# Altium PCB Shark.PcbDoc
Units mil, origin at the board's own origin, x right, y up, seen from the top; angles counter-clockwise.
Board outline 2500 x 4460 mil, 2 copper layers (Top Layer, Bottom Layer); 56 components, 39 nets, 128 pads, 59 vias.
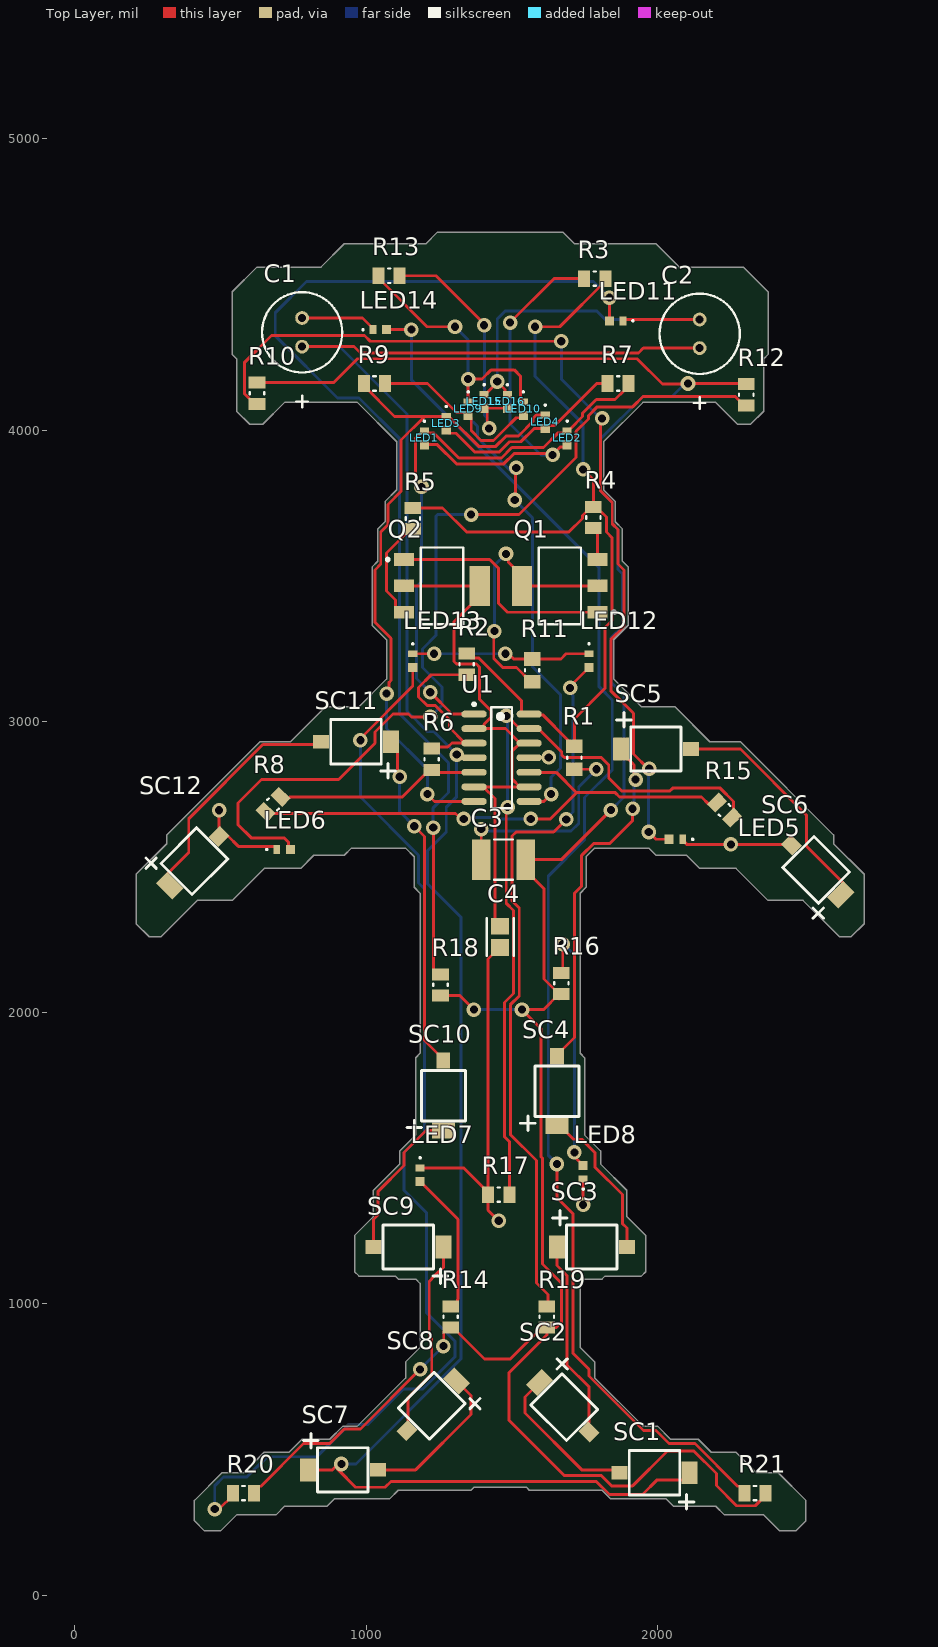
[diagram p0: Top Layer view]
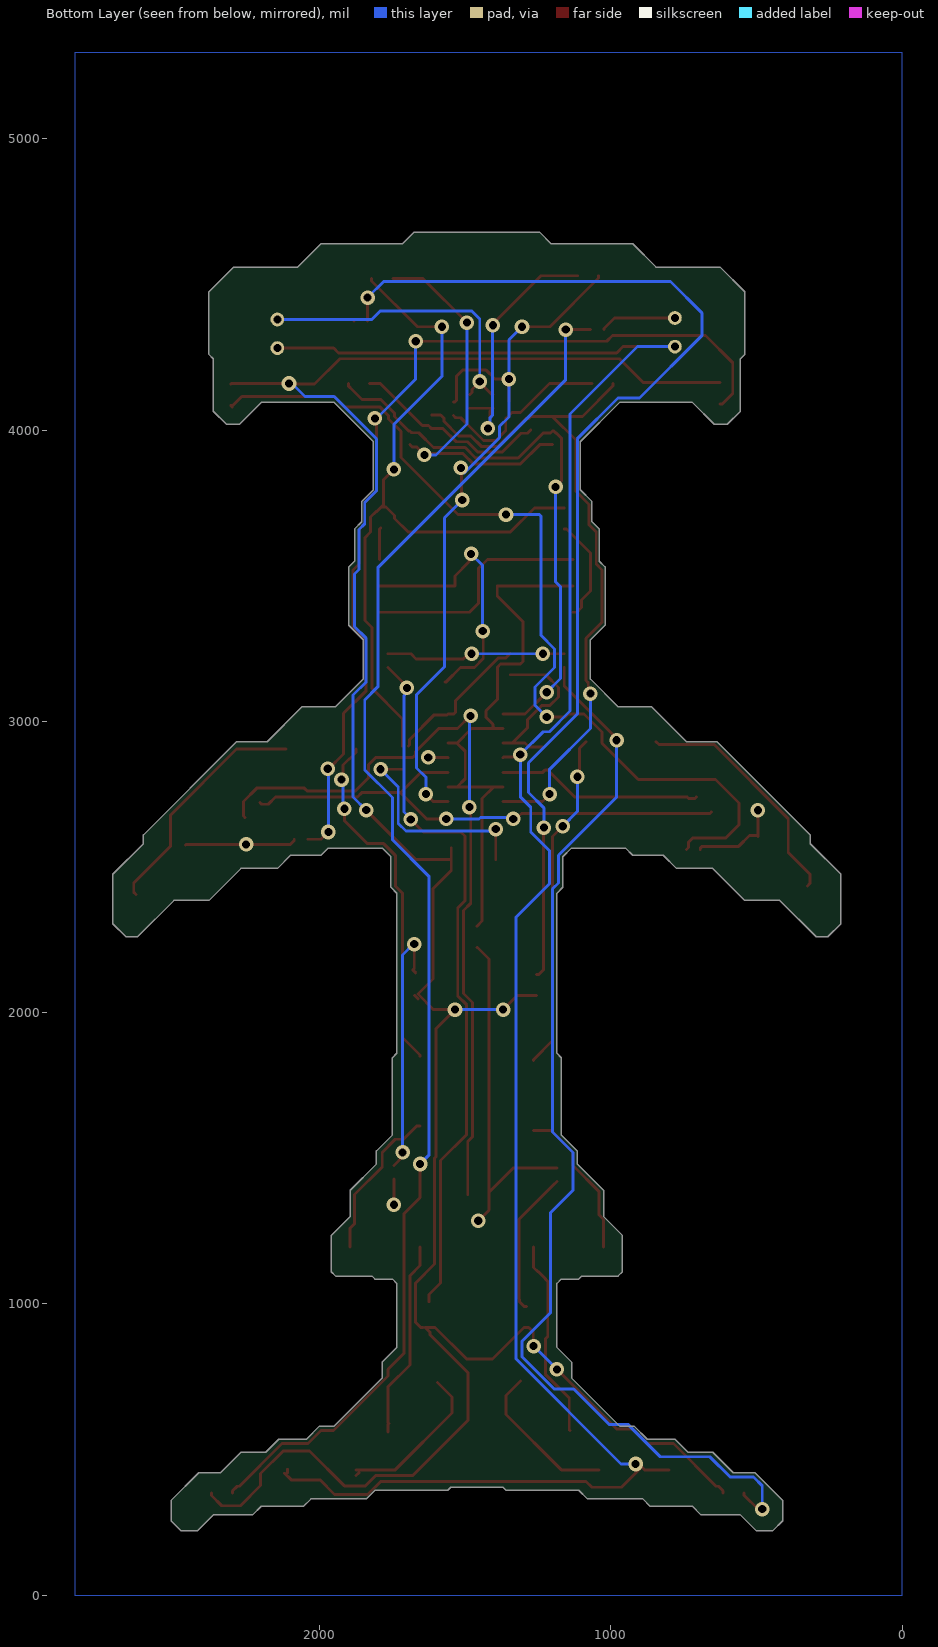
[diagram p1: Bottom Layer view, seen from below]

## Layer stack, top to bottom
Top Solder: solder mask 0.4, Solder Resist, Dk 3.5
Top Layer: signal copper 1.4
Dielectric 1: dielectric 12.6, FR-4, Dk 4.8
Bottom Layer: signal copper 1.4
Bottom Solder: solder mask 0.4, Solder Resist, Dk 3.5

## Board outline
410,255 445,220 500,220 555,275 690,275 720,305 865,305 890,330 1080,330 1110,360 1360,360 1370,370 1550,370 1560,360 1810,360 1840,330 2030,330 2055,305 2200,305 2230,275 2365,275 2420,220 2475,220 2510,255 2510,325 2415,420 2340,420 2270,490 2185,490 2140,535 2045,535 2000,580 1950,580 1785,745 1785,800 1735,850 1735,1070 1750,1085 1810,1085 1820,1095 1945,1095 1960,1110 1960,1235 1895,1300 1895,1390 1805,1480 1805,1525 1750,1580 1750,1845 1735,1860 1735,2410 1755,2430 1755,2535 1785,2565 1970,2565 1995,2540 2100,2540 2145,2495 2270,2495 2380,2385 2500,2385 2625,2260 2665,2260 2710,2305 2710,2475 2605,2580 2605,2610 2285,2930 2180,2930 2060,3050 1945,3050 1850,3145 1850,3280 1900,3330 1900,3530 1880,3550 1880,3660 1855,3685 1855,3755 1815,3795 1815,3960 1950,4095 2200,4095 2275,4020 2320,4020 2365,4065 2365,4245 2380,4260 2380,4475 2295,4560 2075,4560 1995,4640 1715,4640 1675,4680 1245,4680 1205,4640 925,4640 845,4560 625,4560 540,4475 540,4260 555,4245 555,4065 600,4020 645,4020 720,4095 970,4095 1105,3960 1105,3795 1065,3755 1065,3685 1040,3660 1040,3550 1020,3530 1020,3330 1070,3280 1070,3145 975,3050 860,3050 740,2930 635,2930 315,2610 315,2580 210,2475 210,2305 255,2260 295,2260 420,2385 540,2385 650,2495 775,2495 820,2540 925,2540 950,2565 1135,2565 1165,2535 1165,2430 1185,2410 1185,1860 1170,1845 1170,1580 1115,1525 1115,1480 1025,1390 1025,1300 960,1235 960,1110 975,1095 1100,1095 1110,1085 1170,1085 1185,1070 1185,850 1135,800 1135,745 970,580 920,580 875,535 780,535 735,490 650,490 580,420 505,420 410,325

## Design rules (kind name [scope] priority, off if disabled: settings)
Clearance [All] p1: gap=10 ignorepadtopadclearanceinfootprint=FALSE except(0: Arc-Hole Track-Hole SMDPad-Hole THPad-Hole Via-Hole Fill-Hole Poly-Hole Region-Hole Text-Hole)
PolygonConnect [All] p1: connectstyle=Relief reliefconductorwidth=10 reliefentries=4 polygonreliefangle="90 Angle" airgapwidth=10
RoutingVias [All] p1: holewidth=28 width=50 viastyle="Through Hole" minholewidth=28 minwidth=50 maxholewidth=28 maxwidth=50
SolderMaskExpansion [All] p1: expansion=4 istentingtop=FALSE
Width [All] p1: maxlimit=10 minlimit=10 preferedwidth=10
30 further rules are at their usual default settings.

## Components (designator, comment, footprint, x,y, rotation, side; value= is the part's Value field where it differs from the comment)
C1 "0.47F Supercap" JUMT1474MED 780,4385 r90 top
C2 "0.47F Supercap" JUMT1474MED 2145,4380 r90 top
C3 "1 uF" FP-1812-L_4_5_0_3-W_3_2_0-IPC_B 1471.4,2525 r180 top
C4 "100 uF" FP-GRM21B-0_2-e0_2_0_7-IPC_A 1460,2260 r270 top
LED1 "CSL1104WBBW1" CSL1104WBBW1 1200,3970 r90 top
LED2 "CSL1104WBBW1" CSL1104WBBW1 1690,3970 r90 top
LED3 "CSL1104WBBW1" CSL1104WBBW1 1275,4020 r90 top
LED4 "CSL1104WBBW1" CSL1104WBBW1 1615,4025 r90 top
LED5 "CSL1104WBBW1" CSL1104WBBW1 2060,2595 r0 top
LED6 "CSL1104WBBW1" CSL1104WBBW1 720,2560 r180 top
LED7 "CSL1104WBBW1" CSL1104WBBW1 1185,1440 r90 top
LED8 "CSL1104WBBW1" CSL1104WBBW1 1745,1455 r270 top
LED9 "CSL1104WBBW1" CSL1104WBBW1 1350,4070 r90 top
LED10 "CSL1104WBBW1" CSL1104WBBW1 1540,4070 r90 top
LED11 "CSL1104WBBW1" CSL1104WBBW1 1855,4375 r0 top
LED12 "CSL1104WBBW1" CSL1104WBBW1 1765,3205 r90 top
LED13 "CSL1104WBBW1" CSL1104WBBW1 1160,3205 r90 top
LED14 "CSL1104WBBW1" CSL1104WBBW1 1050,4345 r180 top
LED15 "CSL1104WBBW1" CSL1104WBBW1 1405,4095 r90 top
LED16 "CSL1104WBBW1" CSL1104WBBW1 1485,4095 r90 top
Q1 "PZT3906T1G" PZT3906T1G 1665,3465 r90 top
Q2 "PZT3906T1G" PZT3906T1G 1260,3465 r270 top
R1 "100K Ohm" RESC2013X60X35ML10T20 1715,2875 r90 top
R2 "1K Ohm" RESC2013X50X30NL20T20 1345,3196.42 r90 top
R3 "1K Ohm" RESC2013X50X30NL20T20 1785,4520 r0 top
R4 "1K Ohm" RESC2013X50X30NL20T20 1780,3700 r90 top
R5 "1K Ohm" RESC2013X50X30NL20T20 1160,3696.42 r90 top
R6 "1K Ohm" RESC2013X50X30NL20T20 1225,2870 r90 top
R7 "1K Ohm" RESC2013X50X30NL20T20 1865,4160 r0 top
R8 "1K Ohm" RESC2013X50X30NL20T20 680,2715 r45 top
R9 "1K Ohm" RESC2013X50X30NL20T20 1028.58,4160 r180 top
R10 "1K Ohm" RESC2013X50X30NL20T20 625,4126.42 r90 top
R11 "100K Ohm" RESC2013X60X35ML10T20 1570,3175 r270 top
R12 "1K Ohm" RESC2013X50X30NL20T20 2305,4121.42 r90 top
R13 "1K Ohm" RESC2013X50X30NL20T20 1078.58,4530 r180 top
R14 "1K Ohm" RESC2013X50X30NL20T20 1290,955 r270 top
R15 "1K Ohm" RESC2013X50X30NL20T20 2230,2695 r135 top
R16 "1K Ohm" RESC2013X50X30NL20T20 1670,2100 r270 top
R17 "1K Ohm" RESC2013X50X30NL20T20 1455,1375 r0 top
R18 "1K Ohm" RESC2013X50X30NL20T20 1255,2095 r270 top
R19 "1K Ohm" RESC2013X50X30NL20T20 1620,955 r270 top
R20 "1K Ohm" RESC2013X50X30NL20T20 578.58,350 r0 top
R21 "1K Ohm" RESC2013X50X30NL20T20 2335,350 r0 top
SC1 "BPW34S-Z" BPW34S-Z 1989.92,420 r180 top
SC2 "BPW34S-Z" BPW34S-Z 1680,645 r315 top
SC3 "BPW34S-Z" BPW34S-Z 1775,1195 r0 top
SC4 "BPW34S-Z" BPW34S-Z 1655,1730 r90 top
SC5 "BPW34S-Z" BPW34S-Z 1995,2905 r0 top
SC6 "BPW34S-Z" BPW34S-Z 2545,2490 r135 top
SC7 "BPW34S-Z" BPW34S-Z 920,430 r0 top
SC8 "BPW34S-Z" BPW34S-Z 1225,650 r225 top
SC9 "BPW34S-Z" BPW34S-Z 1145,1195 r180 top
SC10 "BPW34S-Z" BPW34S-Z 1265,1715 r90 top
SC11 "BPW34S-Z" BPW34S-Z 965,2930 r180 top
SC12 "BPW34S-Z" BPW34S-Z 410,2520 r45 top
U1 "MCP6544-I/SL" SOIC-SL14_N 1465,2875 r0 top

## Footprints (in the part's own frame and the unit in brackets; to place one, negate y for a bottom-side part, rotate by r counter-clockwise, add the part's x,y. Pads: shape width x height; smd on the part's side, far side on the other; paste and mask are expansions set on the pad)
BPW34S-Z [mm]
  rect 1.4x1.2 smd: A(3.05,0)
  rect 1.4x2 smd: K(-3.05,0)
  silkscreen extent -3.43,-1.92 2.2,3.17
CSL1104WBBW1 [mm]
  rect 0.6x0.8 smd: 1(0.685,0)
  rect 0.8x0.8 smd: 2(-0.508,0)
  silkscreen extent 1.5,-0.05 1.6,0.05, body extent -0.8,-0.4 0.8,0.4, height 0.75
FP-1812-L_4_5_0_3-W_3_2_0-IPC_B [mil]
  rect 63.9x137.96 smd paste+0 mask+0: 1(-76.4,0) 2(76.4,0)
  silkscreen extent -33,-69 33,69, body extent -118,-79 118,79, height 10
FP-GRM21B-0_2-e0_2_0_7-IPC_A [mil]
  rect 57.27x61.27 smd paste+0 mask+0: 1(-36.45,0) 2(36.45,0)
  silkscreen extent -65,-46 65,46, body extent -85,-50 85,50, height 10
JUMT1474MED [mm]
  round 1.2 hole 0.7: 0(-2.5,0) 1(0,0)
  silkscreen extent -7.8,-3.5 2.25,3.5, body extent -4.42,-3.15 1.91,3.15, height 8.75
PZT3906T1G [mm]
  rect 1.1x1.75 smd: 1(-2.3,-3.3) 2(0,-3.3) 3(2.3,-3.3)
  rect 3.5x1.75 smd: 4(0,3.3)
  silkscreen extent -3.35,-4.85 3.35,1.85, body extent -3.35,-3.7 3.35,3.5, height 1.85
RESC2013X50X30NL20T20 [mm] "Chip Resistor, 2-Leads, Body 2.00x1.25mm, IPC Medium Density"
  rect 1.05x1.45 smd: 1(-0.925,0) 2(0.925,0)
  silkscreen extent -0.1,-0.63 0.1,0.63, body extent -1.1,-0.72 1.1,0.72, height 0.5
RESC2013X60X35ML10T20 [mm] "Chip Resistor, 2-Leads, Body 2.1x1.35mm, IPC Low Density"
  rect 1.2x1.45 smd: 1(-1,0) 2(1,0)
  silkscreen extent -0.1,-0.63 0.1,0.63, body extent -1.05,-0.68 1.05,0.67, height 0.6
SOIC-SL14_N [mm] "SOIC, 14-Leads, Body 8.7x3.9mm, Pitch 1.27mm, IPC Medium Density"
  oval 2.2x0.6 smd: 1(-2.4,3.81) 2(-2.4,2.54) 3(-2.4,1.27) 4(-2.4,0) 5(-2.4,-1.27) 6(-2.4,-2.54) 7(-2.4,-3.81) 8(2.4,-3.81) 9(2.4,-2.54) 10(2.4,-1.27) 11(2.4,0) 12(2.4,1.27) 13(2.4,2.54) 14(2.4,3.81)
  silkscreen extent -2.52,-4.4 0.9,4.78, body extent -2,-4.38 2,4.38, height 1.75

## Part data
C1 C2: library part JUMT1474MED, "Cap Supercap 0.47F 2.7V 20% (6.3 X 9mm) Radial 2.5mm 4 Ohm 1000h 70C Bulk Automotive", Capacitance=470mF, Case/Package=Radial, ESR (Equivalent Series Resistance)=4R, Leakage Current=500uA, Manufacturer=Nichicon, Max Operating Temperature=70°C, Min Operating Temperature=-25°C, Package Quantity=200, Supplier Part Number 1=493-3290-ND, Tolerance=20%, Voltage=2.7V, Category=Capacitors, ComponentLink1Description=https://datasheet.ciiva.com/11790/0900766b80ec956c-11790073.pdf?src-supplier=RSComponents, ComponentLink1URL=https://datasheet.ciiva.com/11790/0900766b80ec956c-11790073.pdf?src-supplier=RSComponents, ComponentLink2Description=https://datasheet.ciiva.com/238/e-um-238255.pdf?src-supplier=Digi-Key, ComponentLink2URL=https://datasheet.ciiva.com/238/e-um-238255.pdf?src-supplier=Digi-Key, ComponentLink3Description=https://datasheet.ciiva.com/2992/e-um-2992932.pdf?src-supplier=Avnet, ComponentLink3URL=https://datasheet.ciiva.com/2992/e-um-2992932.pdf?src-supplier=Avnet, ComponentLink4Description=https://datasheet.ciiva.com/1472/e-um-1472004.pdf?src-supplier=Farnell, ComponentLink4URL=https://datasheet.ciiva.com/1472/e-um-1472004.pdf?src-supplier=Farnell, ComponentLink5Description=https://datasheet.ciiva.com/17358/e-um-17358011.pdf?src-supplier=Avnet+Europe, ComponentLink5URL=https://datasheet.ciiva.com/17358/e-um-17358011.pdf?src-supplier=Avnet+Europe, Construction=RADIAL, Depth=9mm, Diameter=6.3mm, Height=9mm, Height - Seated (Max)=0.413inch, Lead Diameter=0.5mm, Lead Free="Lead Free", Lead Pitch=2.5mm, Length=9mm, Life (Hours)=1000Hour, Manufacturer Part Number=JUMT1474MED, Mount="Through Hole", Number of Pins=2, Packaging=Bulk, Pricing 1="1=1.53000, 10=1.21100, 50=1.04980, 100=0.90860, 500=0.68646, 1000=0.60570, 2500=0.56532, 5000=0.54513 (USD)", Radiation Hardening=No, REACH SVHC="No SVHC", RoHS=Yes, RoHS Compliant=Yes, Series=UM, Stock 1=24, Supplier 1=Digi-Key, Termination=Radial, Voltage Rating=2.7V, Voltage Rating (DC)=2.7V
C3: library part CMP-2000-05504-2, "General Purpose Ceramic Capacitor, 1812, 1uF, 10%, X7R, 15%, 100V", Capacitance=1uF, Case Code (Imperial)=1812, Case Code (Metric)=4532, Dielectric=X7R, Insulation Resistance=100GR, Max Operating Temperature=125°C, Min Operating Temperature=-55°C, Package Quantity=1, Tolerance=10%, Voltage=100V, Case/Package=1812, Construction=Flat, Depth=3.2mm, Dissipation Factor=2.5%, Height=2.29mm, Lead Free="Lead Free", Length=4.5mm, Mount="Surface Mount", Packaging="Tape and Reel", Radiation Hardening=No, REACH SVHC="No SVHC", RoHS Compliant=Yes, Series=1812, Termination=SMD/SMT, Thickness=0.09inch, Voltage Rating=100V, Voltage Rating (DC)=100V, Width=0.126inch
C4: library part CMP-2000-07599-2, "Chip Multilayer Ceramic Capacitors for General Purpose, 0805, 100uF, X5R, 15%, 20%, 6.3V", Capacitance=100uF, Case Code (Imperial)=0805, Case Code (Metric)=2012, Dielectric=X5R, Max Operating Temperature=85°C, Min Operating Temperature=-55°C, Tolerance=20%, Voltage Rating=6.3V, Case/Package=0805, Lead Free="Lead Free", Length=0.079inch, Mount="Surface Mount", Packaging="Cut Tape", REACH SVHC="No SVHC", Thickness=0.057inch, Voltage Rating (DC)=6.3V, Width=0.049inch
LED1 LED2 LED3 LED4 LED5 LED6 LED7 LED8 LED9 LED10 LED11 LED12 LED13 LED14 LED15 LED16: "LED", Manufacturer_Name="ROHM Semiconductor", Datasheet Link=https://fscdn.rohm.com/en/products/databook/datasheet/opto/led/chip_mono/csl1104wb1-e.pdf, Height=0.65mm, Manufacturer_Part_Number=CSL1104WBBW1
Q1 Q2: "Transistor Gp Bjt PNP 40V 200MA 4-PIN SOT-223 T/r", Case/Package=TO-261-4, Collector Base Voltage (VCBO)=-40V, Collector Emitter Breakdown Voltage=40V, Collector Emitter Saturation Voltage=-400mV, Collector Emitter Voltage (VCEO)=400mV, Current Rating=-200mA, Emitter Base Voltage (VEBO)=5V, Manufacturer="ON Semiconductor", Max Collector Current=200mA, Max Operating Temperature=150°C, Max Power Dissipation=1.5W, Min Operating Temperature=-55°C, Package Quantity=1000, Supplier Part Number 1=863-PZT3906T1G, Transition Frequency=250MHz, Category=BJTs, Collector-emitter Voltage-Max=400mV, ComponentLink1Description=https://datasheet.ciiva.com/6357/pzt3906t1-d-6357904.pdf?src-supplier=Digi-Key, ComponentLink1URL=https://datasheet.ciiva.com/6357/pzt3906t1-d-6357904.pdf?src-supplier=Digi-Key, Element Configuration=Single, Gain Bandwidth Product=250MHz, hFE Min=60, Lead Free="Lead Free", Manufacturer Part Number=PZT3906T1G, Mount="Surface Mount", Packaging="Tape and Reel", Polarity=PNP, Pricing 1="1=0.71000, 10=0.62300, 50=0.62300, 100=0.47800, 1000=0.30100, 10000=0.30100 (USD)", RoHS=Yes, RoHS Compliant=Yes, Series=-, Stock 1=1663, Supplier 1=Mouser, Voltage Rating (DC)=-40V
R1 R11: library part CMP-2100-03668-1, "Chip Resistor, 100 KOhm, +/- 1%, 0.125 W, -55 to 155 degC, 0805 (2012 Metric), RoHS, Tape and Reel", Case Code (Imperial)=0805, Case Code (Metric)=2012, Manufacturer=Yageo, Max Operating Temperature=155degC, Max Power Dissipation=125mW, Min Operating Temperature=-55degC, Package Description="2-Pin Surface Mounted Device, Body 2 x 1.25 mm", Package Quantity=1, Resistance=100KOhm, Temperature Coefficient=100ppm/degreesC, Tolerance=1%, Voltage Rating=150V, Case/Package=0805, Composition=ThickFilm, Datasheet URL=http://www.yageo.com/NewPortal/yageodocoutput?fileName=/pdf/R-Chip/PYu-RC_Group_51_RoHS_L_5.pdf, Datasheet Version="Rev. 5, 10/2016", Depth=1.25mm, Height=0.024inch, Lead Free=LeadFree, Lead Pitch=0.4mm, Length=2mm, Manufacturer URL=http://www.yageo.com/, Military Standard=Not, Number of Pins=2, Number of Terminations=2, Package Reference=0805, Packaging=TapeandReel, Power Rating=125mW, REACH SVHC=Unknown, RoHSCompliant=true, Termination=SMD/SMT, Voltage Rating (DC)=150V, Width=0.049inch
R2 R3 R4 R5 R6 R7 R8 R9 R10 R12 R13 R14 R15 R16 R17 R18 R19 R20 R21: library part CMP-1013-00510-2, Manufacturer="Vishay Dale", Part Number=CRCW08051K00FKEA
SC1 SC2 SC3 SC4 SC5 SC6 SC7 SC8 SC9 SC10 SC11 SC12: "Photodiode PIN Chip 850nm 0.62A/W Sensitivity Automotive 2-Pin DIL SMT", Case/Package=SMD/SMT, Dark Current=2nA, Forward Current=100mA, Manufacturer="Osram Opto", Max Operating Temperature=100°C, Max Power Dissipation=150mW, Max Reverse Voltage (DC)=32V, Min Operating Temperature=-40°C, Package Quantity=1500, Supplier Part Number 1=475-2659-1-ND, Category=Phototransistor, ComponentLink1Description=https://datasheet.ciiva.com/2819/bpw34-spdf-2819826.pdf?src-supplier=Digi-Key, ComponentLink1URL=https://datasheet.ciiva.com/2819/bpw34-spdf-2819826.pdf?src-supplier=Digi-Key, ComponentLink2Description=https://datasheet.ciiva.com/2819/bpw34-spdf-2819825.pdf?src-supplier=Digi-Key, ComponentLink2URL=https://datasheet.ciiva.com/2819/bpw34-spdf-2819825.pdf?src-supplier=Digi-Key, ComponentLink3Description=https://datasheet.ciiva.com/2819/bpw34-spdf-2819827.pdf?src-supplier=Digi-Key, ComponentLink3URL=https://datasheet.ciiva.com/2819/bpw34-spdf-2819827.pdf?src-supplier=Digi-Key, Contact Plating=Tin,Matte, Diode Type=PIN, Fall Time=20ns, Manufacturer Part Number=BPW34S-Z, Mount="Surface Mount", Number of Pins=2, Packaging="Tape and Reel", Pricing 1="1=1.15000, 10=0.74900, 100=0.49070 (USD)", Radiation Hardening=No, Response Time=20ns, Responsivity=0.62A/W, Reverse Voltage (DC)=32V, Rise Time=20ns, RoHS=Yes, RoHS Compliant=Yes, Series=-, Stock 1=499, Supplier 1=Digi-Key, Viewing Angle=120°, Wavelength=850nm
U1: library part CMP-0187-00281-3, "None", Case/Package=SOIC, Input Bias Current=1pA, Input Offset Voltage (Vos)=7mV, Max Operating Temperature=85°C, Max Supply Current=1mA, Max Supply Voltage=5.5V, Min Operating Temperature=-40°C, Min Supply Voltage=1.6V, Operating Supply Voltage=5V, Output Current=2mA, Package Quantity=57, Power Supply Rejection Ratio (PSRR)=80dB, Quiescent Current=1uA, Amplifier Type=COMPARATOR, Common Mode Rejection Ratio=70dB, Height=1.25mm, Hysteresis=6.5mV, Lead Free="Lead Free", Length=8.65mm, Max Input Current=1pA, Mount="Surface Mount", Nominal Supply Current=1mA, Number of Channels=4, Number of Elements=4, Number of Pins=14, Output Current per Channel=2mA, Output Type=PUSH-PULL, Packaging=Rail/Tube, Propagation Delay=8us, Radiation Hardening=No, Response Time=4us, RoHS Compliant=Yes, Supply Current=1mA, Technology=CMOS, Type="General Purpose", Width=3.9mm

## Via types
v1: diameter 50, hole 28, Top Layer to Bottom Layer, 59 vias

## Nets (pads, with @x,y where several pads share a name; then routed paths per layer and width w, separated by ;. In a path a pad name is that pad's centre, name@x,y a point inside that pad or via, vN(x,y) a via of type N, cw(c..) or ccw(c..) an arc to the next point about the centre after c; other vN are vias at no path point)
+3: C1.0 C2.0 SC1.K SC7.K U1.4 | length 7311.4
  Top Layer w10: C1.0 958.43,4286.57 980,4265 1935,4265 1951.57,4281.57 C2.0 ; SC7.K 884.18,430 904.18,450 v1(915,450) ; v1@903.74,430 963.74,370 1065,370 1085,390 1790,390 1835,345 1948.44,345 1999.07,395.63 2097.52,395.63 SC1.K@2120.08,418.19 ; v1(1310.78,2885.78) 1321.61,2885.78 1329.79,2877.61 1367.91,2877.61 U1.4 ; SC1.K SC1.K@2110,431.81
  Bottom Layer w10: C1.0 908.43,4286.57 1140,4055 1140,3035 1210.78,2964.22 1232.35,2964.22 v1(1310.78,2885.78) 1310.78,2740.78 1275,2705 1275,2620 1210,2555 1210,2443.28 1325,2328.28 1325,810 965,450 v1(915,450)
CLK: R1.2 R2.2 R3.2 R4.2 R5.2 U1.14 | length 3138.8
  Top Layer w10: R5.2 1262.17,3732.83 1345,3650 1695.71,3650 1742.31,3696.61 1742.31,3706.61 1772.13,3736.42 R4.2@1787.87,3736.42 ; R2.2 1360.67,3217.17 1386.54,3217.17 1532.99,3070.72 1532.99,3031.29 1539.28,3025 U1.14 1562.09,3022.39 1606.18,3022.39 1691.46,2937.11 1691.46,2918.54 R1.2@1695,2915 ; v1(1580,4355) 1664.29,4355 1821.42,4512.13 R3.2 ; R1.2 1715,3008.43 1820,3113.43 1820,3322.21 1844.37,3346.58 1844.37,3630.63 1825,3650 1825,3701.42 1805.67,3720.75 1803.54,3720.75 1785,3739.29 1780,3744.29 1780,3830 v1(1745,3865)
  Bottom Layer w10: v1(1580,4355) 1580,4185 1745,4020 v1(1745,3865)
GND: C1.1 C2.1 C4.2 LED5.1 LED6.1 LED7.1 LED8.1 LED11.1 LED12.1 LED13.1 LED14.1 LED15.1 LED16.1 R11.1 R17.1 SC6.A SC12.A U1.11 | length 4296.8
  Top Layer w10: v1(494.91,2694.91) SC12.A 497.69,2607.69 524.03,2607.69 560.97,2570.75 686.22,2570.75 693.03,2563.94 LED6.1 ; C1.1 986.97,4385 1023.03,4348.94 LED14.1 ; LED13.1 v1(1233.03,3231.97) ; LED7.1 1334.49,1466.97 R17.1@1418.58,1382.87 ; LED15.1 1408.94,4121.97 1450,4163.03 v1(1450,4166.97) 1477.08,4139.89 1477.08,4128.78 1483.89,4121.97 LED16.1 ; v1(1455,1285) 1418.58,1321.42 R17.1@1418.58,1382.87 ; C4.2 1458,2223.55 1418.58,2184.13 R17.1@1418.58,1382.87 ; v1(1478.03,3231.97) 1488.86,3231.97 1506.45,3214.37 R11.1 1668.5,3214.37 1686.1,3231.97 LED12.1 ; U1.11 1560,2875.51 1626.4,2875.51 v1(1626.91,2876.02) ; v1(1745,1340.37) LED8.1 ; LED11.1 1886.97,4380 C2.1 ; LED5.1 2086.97,2591.06 2100.34,2577.69 v1(2252.45,2577.69) 2457.31,2577.69 SC6.A
  Bottom Layer w10: v1(1233.03,3231.97) v1(1478.03,3231.97) ; v1(1450,4166.97) 1450,4381.57 1477.57,4409.14 1791.68,4409.14 1820.82,4380 C2.1
NetC3_1: C3.1 R10.2 R12.2 R14.2 R16.2 R18.2 R19.2 R20.2 R21.2 | length 8937.2
  Top Layer w10: R20.2 615,357.87 630.67,373.54 638.54,373.54 785,520 875,520 925,570 980,570 v1(1185,775) ; R10.2 887.83,4162.83 970,4245 1930,4245 2017.17,4157.83 2102.83,4157.83 v1(2105,4160) 2302.83,4160 R12.2 ; R18.2 1321.42,2058.58 v1(1370,2010) ; v1(1265,855) 1266.46,856.46 1266.46,902.91 1282.13,918.58 R14.2 1297.87,918.58 1406.46,810 1495,810 1603.58,918.58 R19.2 1637.13,918.58 1621.46,902.91 1621.46,895.04 1490,763.58 1490,600 1680,410 1807.45,410 1842.45,375 1915,375 2035,495 2125,495 2202.52,417.48 2202.52,375.63 2271.7,306.46 2335.75,306.46 2371.42,342.13 R21.2 ; C3.1@1547.8,2527.97 C3.1@1547.8,2565 ; R19.2@1645,918.58 1652.87,918.58 1670,935.71 1670,1071.4 1605,1136.4 1605,1500.07 1600.63,1504.44 1600.63,1944.37 v1(1535,2010) 1608.54,2010 1662.13,2063.58 1610.6,2115.11 1610.6,2425.17 1574.75,2461.02 1547.8,2487.97 C3.1 1670,2525 v1(1840,2695) ; R16.2@1661.46,2046.5 R16.2@1674.27,2059.31
  Bottom Layer w10: v1(1185,775) v1(1265,855) ; v1(1370,2010) v1(1535,2010) ; v1(1840,2695) 1884.85,2739.85 1884.85,3090.15 1840,3135 1840,3285 1880,3325 1880,3505.54 1864.37,3521.17 1864.37,3659.17 1845,3678.54 1845,3751.84 1805,3791.84 1805,3970 1950,4115 2050,4115 2095,4160 v1(2105,4160)
NetC3_2: C3.2 R1.1 | length 740.6
  Top Layer w10: C3.2 v1(1395,2630) ; R1.1 v1(1790.63,2835.63)
  Bottom Layer w10: v1(1395,2630) 1401.91,2623.09 1703.48,2623.09 1730,2649.61 1730,2775 v1(1790.63,2835.63)
NetC4_1: C4.1 Q2.2 Q2.4 U1.2 U1.6 U1.9 U1.12 | length 1966.1
  Top Layer w10: Q2.2 Q2.4 1389.92,3430.55 1301.46,3342.09 1301.46,3205.95 1310.99,3196.42 1379.01,3196.42 1388.54,3186.88 1388.54,3076.38 1428.82,3036.11 1428.82,3013.89 1404.61,2989.69 1404.61,2981.29 U1.2@1398.32,2975 ; U1.6 U1.6@1402.01,2775 ; U1.2 U1.2@1398.32,2975 ; C4.1 1441.95,2314.5 1441.95,2735.06 U1.6@1402.01,2775 ; U1.9 U1.9@1527.99,2775 ; U1.12 U1.12@1527.99,2925 ; U1.2@1398.32,2975 1477.99,2975 U1.12@1527.99,2925 ; U1.6@1402.01,2775 U1.9@1527.99,2775 ; U1.9@1527.99,2775 1500,2802.99 1500,2825 1500,2897.01 U1.12@1527.99,2925
NetLED1_1: LED1.1 LED2.1 R7.2 U1.1 | length 1986.9
  Top Layer w10: v1(1189.82,3805.18) 1169.25,3825.75 1169.25,3971.96 1187.45,3990.16 1189.25,3990.16 1196.06,3996.97 LED1.1 1206.81,3990.16 1216.45,3990.16 1216.61,3990 1232.29,3990 1318.04,3904.25 1464.4,3904.25 1500.15,3940 1608.43,3940 1659.25,3990.82 1683.85,3990.82 LED2.1 1693.94,3996.97 1700.75,4003.78 1700.75,4004.03 1742.95,4046.23 1742.95,4057.8 1790.15,4105 1854.29,4105 1885.75,4136.46 1901.42,4152.13 R7.2 ; v1(1220,3100) 1295,3025 U1.1
  Bottom Layer w10: v1(1189.82,3805.18) 1189.82,3479.06 1173.03,3462.26 1173.03,3146.97 v1(1220,3100)
NetLED1_2: LED1.2 LED2.2 R3.1 | length 1403.5
  Top Layer w10: LED1.2 1244.01,3950 1309.75,3884.25 1472.68,3884.25 1508.43,3920 1635,3920 v1(1640,3915) 1667.61,3942.61 1682.61,3942.61 LED2.2 ; v1(1494.14,4369.14) 1645,4520 R3.1
  Bottom Layer w10: v1(1494.14,4369.14) 1494.14,4020.86 1600,3915 v1(1640,3915)
NetLED3_1: LED3.1 LED4.1 R9.2 U1.7 | length 2397.2
  Top Layer w10: R9.2 992.17,4152.13 1097.32,4046.97 1201.23,4046.97 ; v1(1070,3095) 1077.65,3102.65 1077.65,3132.65 1085,3140 1085,3285 1030,3340 1030,3520 1050,3540 1050,3650 1075,3675 1075,3745 1120,3790 1120,3965.74 1201.23,4046.97 ; v1(1210,2750) 1235,2725 U1.7 ; LED3.1 1281.81,4040.16 1290.48,4040.16 1386.39,3944.25 1445.2,3944.25 1480.95,3980 1522.71,3980 1573.11,4030.4 1573.11,4040.82 1584.25,4051.97 LED4.1 ; LED3.1@1278.94,4046.97 1201.23,4046.97
  Bottom Layer w10: v1(1070,3095) 1070,2975.41 1210,2835.41 v1(1210,2750)
NetLED3_2: LED3.2 LED4.2 R7.1 | length 682.6
  Top Layer w10: LED3.2 1285.75,3989.25 1308.37,3989.25 1373.37,3924.25 1456.12,3924.25 1491.86,3960 1530.99,3960 1575.99,4005 LED4.2 1625.75,4015.75 1647.2,4015.75 1791.46,4160 R7.1
NetLED5_2: LED5.2 R10.1 | length 3237.8
  Top Layer w10: R10.1 617.13,4090 581.46,4125.67 581.46,4231.46 675.2,4325.2 994.06,4325.2 1014.26,4305 v1(1670,4305) ; v1(1810,4040) 1805,4035 1805,3791.84 1845,3751.84 1845,3678.54 1864.37,3659.17 1864.37,3540 1885,3519.37 1885,3325 1840,3280 1840,3105 1917.48,3027.52 1917.48,2887.93 1968.33,2837.08 v1(1972.14,2837.08) ; v1(1970,2620) 1995,2595 LED5.2
  Bottom Layer w10: v1(1670,4305) 1670,4175 1805,4040 v1(1810,4040) ; v1(1970,2620) 1970,2834.95 v1(1972.14,2837.08)
NetLED6_2: LED6.2 R12.1 | length 3180.7
  Top Layer w10: LED6.2 733.31,2566.69 733.31,2584.89 718.2,2600 605,2600 560,2645 560,2720 640.55,2800.55 905.55,2800.55 1030,2925 1030,2963.06 1091.94,3025 1145.63,3025 1155.56,3015.07 v1(1220.07,3015.07) ; v1(1360,3710) 1525,3710 1720.75,3905.75 1720.75,3995.75 1762.95,4037.95 1762.95,4049.52 1793.43,4080 1915,4080 1950,4115 2267.13,4115 2297.13,4085 R12.1 R12.1@2300,4080
  Bottom Layer w10: v1(1220.07,3015.07) 1260,3055 1260,3118.28 1193.03,3185.25 1193.03,3248.54 1240,3295.51 1240,3704.14 1245.86,3710 v1(1360,3710)
NetLED7_2: LED7.2 R14.1 | length 497.4
  Top Layer w10: LED7.2 1195.75,1409.25 1315,1290 1315,1016.42 1313.54,1014.96 1313.54,1007.09 1297.87,991.42 R14.1
NetLED8_2: LED8.2 R16.1 | length 895.6
  Top Layer w10: R16.1 1680,2146.42 1675,2151.42 v1(1675,2235) ; v1(1715,1520) 1715,1505 LED8.2
  Bottom Layer w10: v1(1675,2235) 1678.12,2235 1715,2198.12 v1(1715,1520)
NetLED9_1: LED9.1 LED10.1 R13.2 U1.8 | length 2606.9
  Top Layer w10: R13.2 1042.17,4522.13 1209.29,4355 v1(1305,4355) ; LED9.1 v1(1350,4175) 1397.71,4175 1429.68,4206.97 1508.03,4206.97 1529.25,4185.75 1529.25,4103.78 1536.06,4096.97 LED10.1 ; v1(1510,3760) 1512.5,3762.5 1512.5,3867.5 v1(1515,3870) ; U1.8 1610,2725 v1(1635,2750)
  Bottom Layer w10: v1(1305,4355) 1350,4310 v1(1350,4175) 1350,4045 1382,4013 1382,3973.99 1503,3853 1515,3865 v1(1515,3870) ; v1(1510,3760) 1571.19,3698.81 1571.19,3187.25 1666.91,3091.52 1666.91,2839.93 1635,2808.02 v1(1635,2750)
NetLED9_2: LED9.2 LED10.2 R9.1 | length 615.7
  Top Layer w10: R9.1 1210.74,4160 1309.99,4060.75 1339.25,4060.75 LED9.2 1360.75,4039.25 1360.75,3998.17 1394.67,3964.25 1436.92,3964.25 1474.81,4002.15 1515.11,4042.45 1532.45,4042.45 LED10.2
NetLED11_2: LED11.2 R18.1 | length 3891.6
  Top Layer w10: v1(1230,2635) 1231.46,2633.54 1231.46,2147.09 1247.13,2131.42 R18.1 ; LED11.2 v1(1835,4455)
  Bottom Layer w10: v1(1230,2635) 1230,2703.07 1282.35,2755.41 1282.35,2857.65 1115,3025 1115,3970 975,4110 901.96,4110 687.62,4324.34 687.62,4402.62 795,4510 1780,4510 v1(1835,4455)
NetLED12_2: LED12.2 R19.1 | length 2447.6
  Top Layer w10: R19.1@1624.33,1007.09 1624.33,1032.09 1585,1071.42 1585,1491.78 1495,1581.78 1495,2026.57 1525.63,2057.2 1525.63,2359.06 1500.84,2383.84 1500.84,2605.84 1515,2620 1643.82,2620 v1(1686.91,2663.09) ; v1(1700,3115) 1700,3120 LED12.2
  Bottom Layer w10: v1(1686.91,2663.09) 1686.91,2665.19 1710,2688.28 1710,3089.14 1707.65,3091.49 1707.65,3107.35 v1(1700,3115)
NetLED13_2: LED13.2 R20.1 | length 3812.1
  Top Layer w10: v1(480,295) 495.04,295 542.17,342.13 R20.1 ; v1(980,2935) 980,2941.35 1160,3121.35 LED13.2
  Bottom Layer w10: v1(480,295) 480,375 510,405 590,405 660,475 830,475 940,585 1005,585 1127.5,707.5 1194.22,707.5 1305,818.28 1305,871.57 1206.57,970 1206.57,1313.43 1130,1390 1130,1520 1200,1590 1200,2425 1180,2445 1180,2540 980,2740 v1(980,2935)
NetLED14_2: LED14.2 R21.1 | length 4817.4
  Top Layer w10: LED14.2 v1(1155,4345) ; v1(1655,1480) 1655,1364.45 1710,1309.45 1710,830 1765,775 1765,752.12 1952.12,565 1995,565 2040,520 2128.58,520 2275.04,373.54 2282.91,373.54 2298.58,357.87 R21.1
  Bottom Layer w10: v1(1155,4345) 1155,4172.71 1800,3527.71 1800,3118.43 1844.85,3073.58 1844.85,2833.28 1750,2738.43 1750,2593.43 1625,2468.43 1625,1510 v1(1655,1480)
NetLED15_2: LED15.2 LED16.2 R13.1 | length 880.6
  Top Layer w10: R13.1 1240,4530 1405,4365 v1(1405,4360) ; v1(1422,4005.91) 1415.75,4012.16 1415.75,4064.25 LED15.2 LED16.2
  Bottom Layer w10: v1(1405,4360) 1405.83,4359.17 1405.83,4050.91 1414.35,4042.39 1414.35,4013.56 v1(1422,4005.91)
NetQ1_1: Q1.1 Q2.1 | length 809.8
  Top Layer w10: Q2.1 1423.93,3555.55 1455,3524.48 1455,3405 1485.55,3374.45 Q1.1
NetQ1_2: Q1.2 Q1.4 R11.2 | length 934.7
  Top Layer w10: v1(1440,3310) 1438.03,3308.03 1438.03,3215.4 1468.61,3184.83 1515.88,3184.83 1565.08,3135.63 R11.2 ; v1(1480,3575) 1487.65,3567.35 1487.65,3546.87 1535.08,3499.45 Q1.4 Q1.2
  Bottom Layer w10: v1(1440,3310) 1440,3535 v1(1480,3575)
NetQ1_3: Q1.3 R4.1 | length 110.1
  Top Layer w10: R4.1@1790,3663.58 1794.92,3658.66 Q1.3
NetQ2_3: Q2.3 R5.1 | length 359.8
  Top Layer w10: Q2.3 1117.28,3374.45 1100.63,3391.1 1100.63,3417.13 1070,3447.76 1070,3577.87 1152.13,3660 R5.1
NetR2_1: R2.1 R6.2 U1.3 | length 597.7
  Top Layer w10: R6.2@1235,2911.42 1279.85,2911.42 1294.22,2925.78 U1.3@1338.23,2925.78 ; R2.1 1223.43,3160 1180,3116.57 1180,3083.43 1208.36,3055.07 1236.64,3055.07 1285.6,3006.11 1285.6,2978.41 U1.3@1338.23,2925.78 ; U1.3 1339.02,2925 U1.3@1338.23,2925.78
NetR6_1: R6.1 R8.2 U1.5 | length 711.4
  Top Layer w10: R8.2 711.32,2735.18 733.48,2735.18 739.05,2740.75 1124.29,2740.75 1217.13,2833.58 R6.1 1233.58,2825 U1.5
NetR8_1: R8.1 R15.2 U1.10 | length 1812
  Top Layer w10: R8.1 659.82,2683.68 1306.32,2683.68 1325,2665 v1(1335,2665) ; U1.10 1652.25,2825 1722.25,2755 ; v1(1565,2665) 1632.25,2665 1722.25,2755 ; R15.2 2198.68,2715.18 2176.52,2715.18 2151.56,2740.15 1870,2740.15 1855.15,2755 1722.25,2755
  Bottom Layer w10: v1(1335,2665) 1340,2670 1447.73,2670 1452.73,2665 v1(1565,2665)
NetR15_1: R15.1 R17.2 U1.13 | length 2677.3
  Top Layer w10: v1(1481.58,3018.89) 1482.84,3018.89 1526.73,2975 U1.13 1590.98,2975 1671.46,2894.53 1671.46,2884.53 1680.36,2875.63 1807.2,2875.63 1832.78,2850.05 1832.78,2805.66 1878.28,2760.15 2041.96,2760.15 2052.36,2770.55 2216.03,2770.55 2261.32,2725.26 2261.32,2674.82 R15.1 ; v1(1485.46,2705.46) 1480.84,2700.84 1480.84,2375.56 1505.63,2350.77 1505.63,2065.49 1475,2034.85 1475,1573.5 1491.42,1557.08 R17.2
  Bottom Layer w10: v1(1481.58,3018.89) 1485.46,3015.02 v1(1485.46,2705.46)
NetSC1_A: SC1.A SC2.K | length 550.6
  Top Layer w10: SC2.K 1545,679.82 1545,625 1740,430 SC1.A@1875,430 ; SC1.A@1864.92,420 SC1.A@1874.92,410
NetSC2_A: SC2.A SC3.K | length 682.8
  Top Layer w10: SC3.K 1654.92,1131.65 1690,1096.57 1690,790 1764.91,715.09 1764.91,592 1762.12,589.21 1764.91,586.43 SC2.A
NetSC3_A: SC3.A SC4.K | length 537.8
  Top Layer w10: SC4.K 1666.81,1609.92 1711.73,1565 1740,1565 1785,1520 1785,1470 1880,1375 1880,1275 1895.08,1259.92 SC3.A
NetSC4_A: SC4.A SC5.K | length 1220.7
  Top Layer w10: SC4.A 1655,1854.02 1715,1914.02 1715,2410 1740,2435 1740,2540 1780,2580 1835,2580 1915,2660 v1(1915,2700) ; SC5.K 1874.92,2893.19 1897.48,2870.63 1899.37,2870.63 1914.92,2855.08 1919.93,2850.07 1919.93,2805.07 v1(1924.85,2800.15)
  Bottom Layer w10: v1(1915,2700) 1919.93,2704.93 1919.93,2795.22 v1(1924.85,2800.15)
NetSC5_A: SC5.A SC6.K | length 819.6
  Top Layer w10: SC5.A 2285,2905 2511.28,2678.72 2511.28,2572.32 2638.26,2445.35 2638.26,2413.44 SC6.K
NetSC7_A: SC7.A SC8.K | length 534.3
  Top Layer w10: SC7.A 1170,430 1360,620 1360,684.82 SC8.K
NetSC8_A: SC8.A SC9.K | length 689.7
  Top Layer w10: SC8.A 1142.88,567.88 1142.88,676.31 1225,758.43 1225,879.57 1216.46,888.12 1216.46,1076.46 1225,1085 1225,1086.57 1248.43,1110 1250,1110 1265.08,1125.08 SC9.K
NetSC9_A: SC9.A SC10.K | length 534.6
  Top Layer w10: SC9.A 1024.92,1289.92 1040,1305 1040,1385 1130,1475 1130,1520 1204.92,1594.92 SC10.K
NetSC10_A: SC10.A SC11.K | length 1169.4
  Top Layer w10: SC11.K 1107.64,2907.44 1107.64,2817.36 v1(1115,2810) ; v1(1165,2640) 1200,2605 1200,1904.02 1265,1839.02 SC10.A
  Bottom Layer w10: v1(1115,2810) 1115,2690 v1(1165,2640)
NetSC11_A: SC11.A SC12.K | length 828.4
  Top Layer w10: SC12.K 316.74,2443.44 316.74,2475.35 390.87,2549.48 390.87,2665.87 645,2920 834.92,2920 SC11.A

## Polygon pours and split planes (outlines as drawn)
GND on Bottom Layer "NONET_L02_P000" (solid, shelved, pour order 0): 0,5295 2840,5295 2840,0 0,0